# EAGLE board LEDtest (EAGLE 8.4.1)

Size 7.62 x 7.62 mm. Coordinates in mm from the lower left corner, seen from the top.
Outline: 0,0 0,7.62 7.62,7.62 7.62,0 0,0
Copper layers (1*16): Top 0.035mm / dielectric 1.5mm / Bottom 0.035mm
Design rules "default *": minimum track width 16mil, minimum drill 1mm, track to track 0.25mm, track to pad 0.25mm, pad to pad 0.25mm, via to via 0.25mm, smd to smd 0mil, copper to edge 40mil, drill to drill 6mil, minimum pad ring 0mil, minimum via ring 8mil, stop-mask expansion 4mil, vias tented up to drill 0mil, thermal gap 10mil

## Footprints (pad centres in the part's own frame; a part is rotated, then mirrored left to right if it is on the bottom)
WS2812B_THT_ROUND = drill 1 pad 1.016 offset: 1 -1.905,0; 2 -0.635,0; 3 0.635,0; 4 1.905,0

## Placement (x,y rotation side)
E$1  [WS2812B_THT_ROUND]  3.81,3.81 0 top

## Library data of the parts
E$1 = Components